# Altium PCB Main.PcbDoc
Units mil, origin at the board's own origin, x right, y up, seen from the top; angles counter-clockwise.
Board outline 670 x 1460 mil, 2 copper layers (Top Layer, Bottom Layer); 20 components, 20 nets, 81 pads, 10 vias.
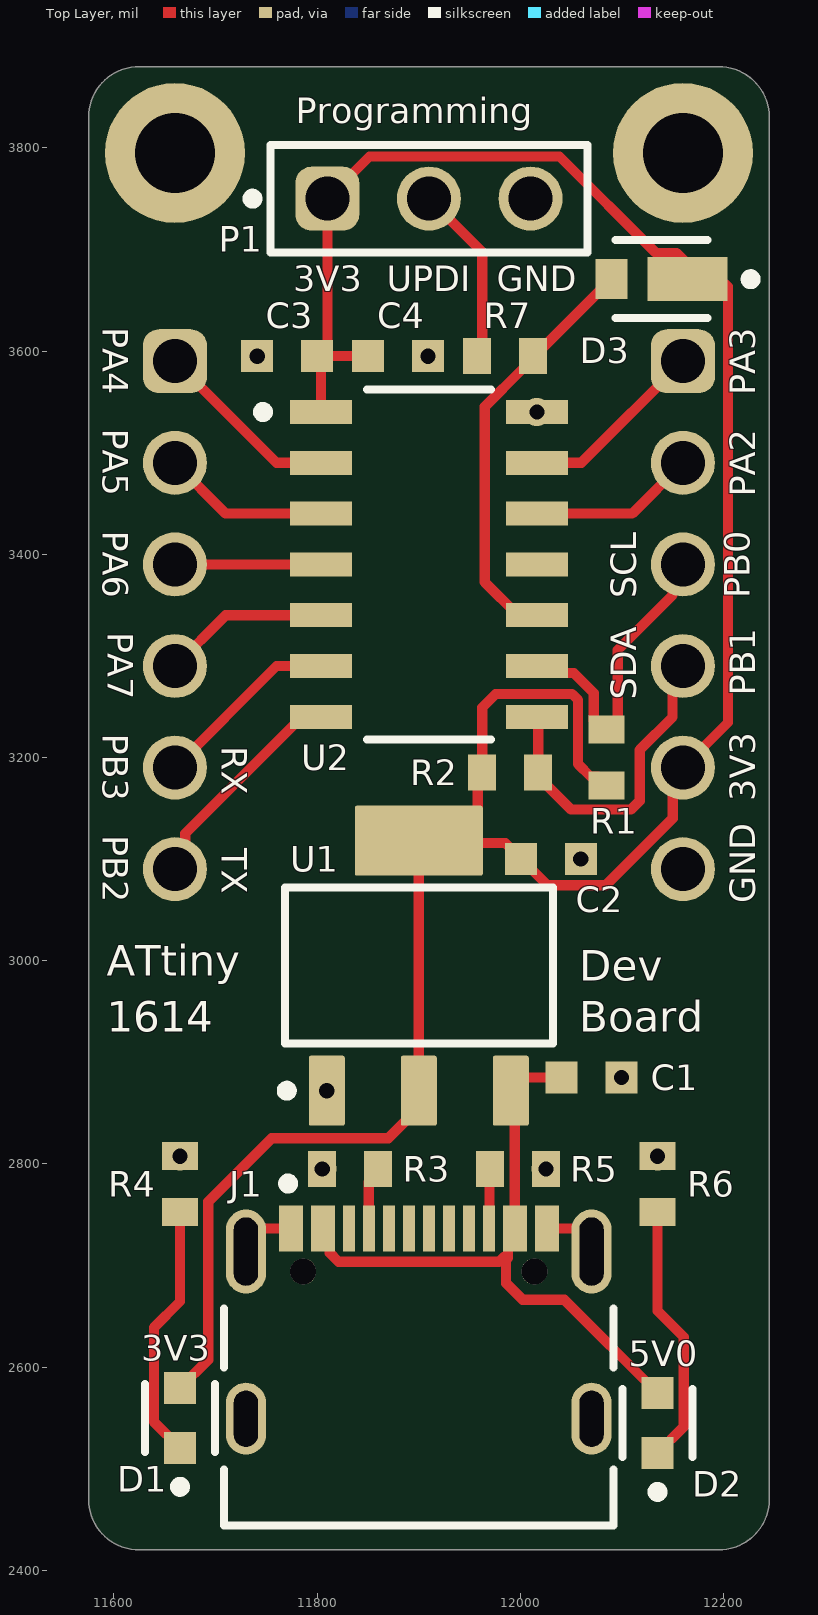
[diagram p0: Top Layer view]
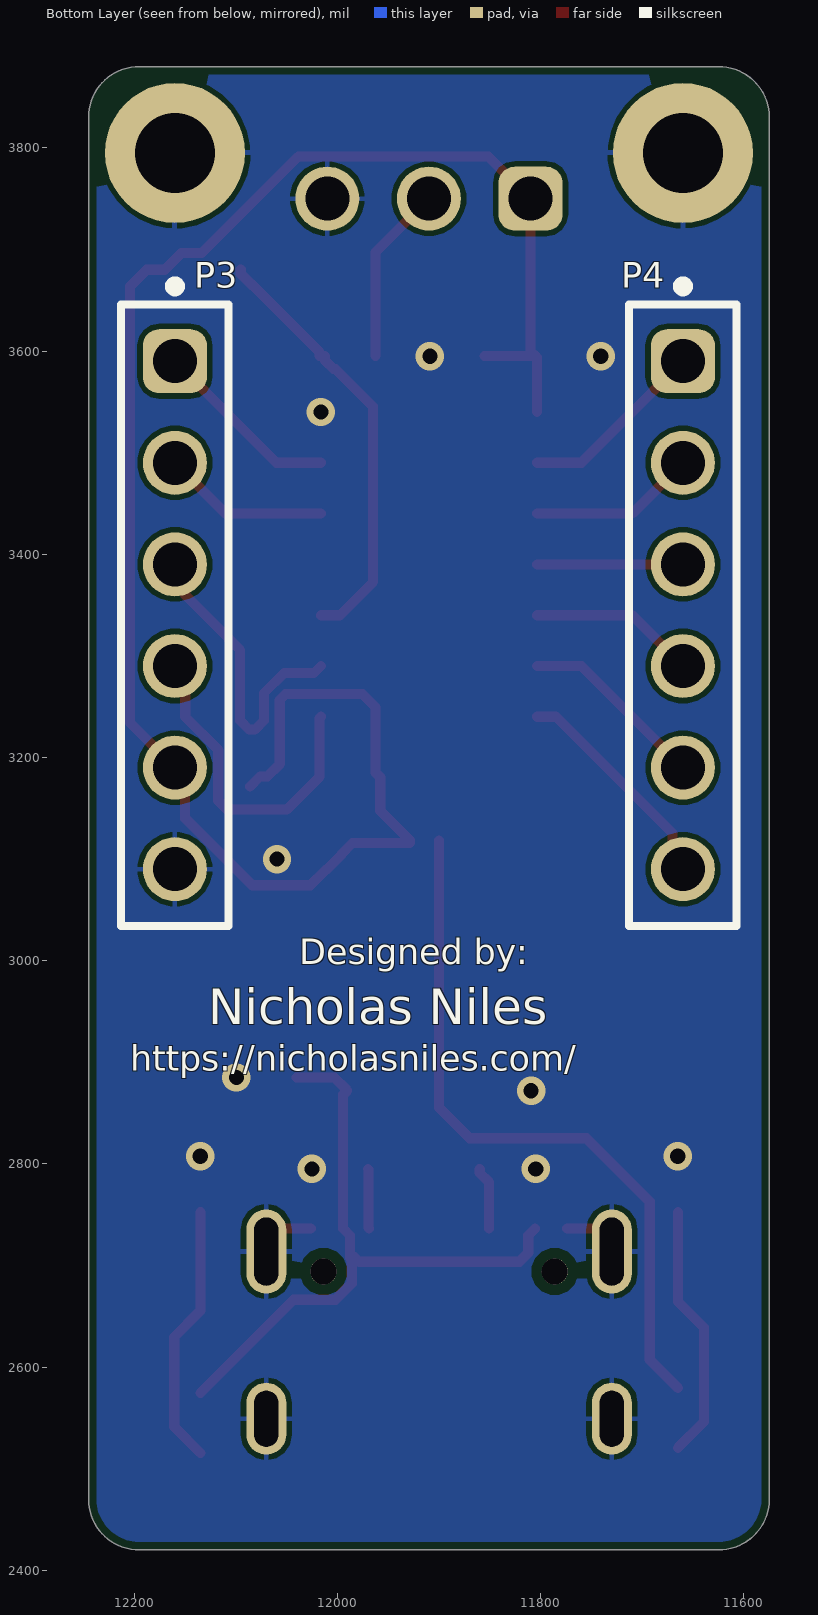
[diagram p1: Bottom Layer view, seen from below]
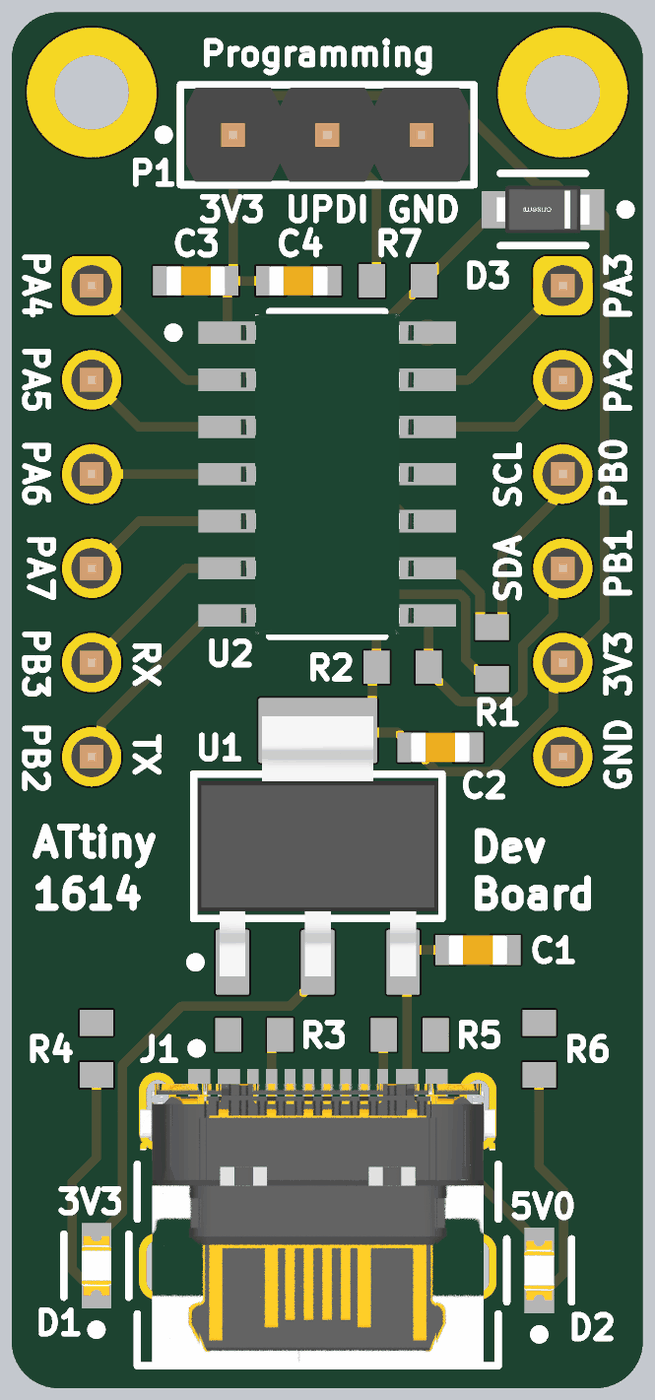
[diagram p2: 3D render of the assembled board from above, using the file's embedded part models]

## Layer stack, top to bottom
Top Solder: solder mask 0.4, Solder Resist, Dk 3.5
Top Layer: signal copper 1.4
Dielectric 1: dielectric 12.6, FR-4, Dk 4.8
Bottom Layer: signal copper 1.4
Bottom Solder: solder mask 0.4, Solder Resist, Dk 3.5

## Board outline
11575,2470 11575,3830 cw(c11625,3830) 11625,3880 12195,3880 cw(c12195,3830) 12245,3830 12245,2470 cw(c12195,2470) 12195,2420 11625,2420 cw(c11625,2470)

## Design rules (kind name [scope] priority, off if disabled: settings)
BoardOutlineClearance [All] p1: gap=7.87 ignorepadtopadclearanceinfootprint=FALSE
Clearance [All] p1: gap=5 ignorepadtopadclearanceinfootprint=TRUE except(10: Arc-Hole Track-Hole SMDPad-Hole THPad-Hole Via-Hole Fill-Hole Poly-Hole Region-Hole Text-Hole)
ComponentClearance [All] p1: gap=5 collisioncheckmode=3 verticalgap=5 showdistances=TRUE
DiffPairsRouting [All] p1: maxlimit=10 minlimit=5 mostfreqgap=5 toplayer_minwidth=5 toplayer_maxwidth=1000 toplayer_prefwidth=5 bottomlayer_minwidth=5 bottomlayer_maxwidth=1000 bottomlayer_prefwidth=5 maxuncoupledlength=500
Height [All] p1: minheight=0 maxheight=71497.94 prefheight=500
HoleSize [All] p1: absolutevalues=TRUE maxlimit=248.03 minlimit=11.81 maxpercent=80.000 minpercent=20.000
HoleToHoleClearance [All] p1: gap=10 allowstackedmicrovias=FALSE
MinimumAnnularRing [All] p1: minimumring=6
MinimumSolderMaskSliver [All] p1: minsoldermaskwidth=6
PlaneClearance [All] p1: clearance=5
PlaneConnect PlaneConnectPowerPads [InPadClass('PowerPads')] p1: planeconnectstyle=Direct reliefexpansion=20 reliefentries=4 reliefconductorwidth=10 reliefairgap=10
PlaneConnect [All] p2: pad.planeconnectstyle=Relief pad.reliefexpansion=11.81 pad.reliefentries=4 pad.reliefconductorwidth=5 pad.reliefairgap=5 via.planeconnectstyle=Direct via.reliefexpansion=11.81 via.reliefentries=4 via.reliefconductorwidth=5 via.reliefairgap=5
PolygonConnect PolygonConnectPowerPads [All vs (InPadClass('PowerPads'))] p1: connectstyle=Direct reliefconductorwidth=10 reliefentries=4 polygonreliefangle="90 Angle" airgapwidth=10
PolygonConnect [All] p2: thpad.connectstyle=Relief thpad.reliefconductorwidth=5 thpad.reliefentries=4 thpad.polygonreliefangle="90 Angle" thpad.airgapwidth=5 smdpad.connectstyle=Relief smdpad.reliefconductorwidth=5 smdpad.reliefentries=4 smdpad.polygonreliefangle="90 Angle" smdpad.airgapwidth=5 via.connectstyle=Direct via.reliefconductorwidth=5 via.reliefentries=4 via.polygonreliefangle="90 Angle" via.airgapwidth=5
RoutingVias [All] p1: holewidth=11.81 width=23.62 viastyle="Through Hole" minholewidth=11.81 minwidth=23.62 maxholewidth=23.62 maxwidth=259.84
SilkToSilkClearance [All] p1: silktosilkclearance=5
SilkToSolderMaskClearance [IsPad] p1: minsilkscreentomaskgap=5 clearancetoexposedcopper=TRUE
SolderMaskExpansion [All] p1: expansion=2 istentingtop=FALSE
SupplyNets "Schematic Supply Nets_3" [InNet('3V3')] p1: voltage=0.000
SupplyNets "Schematic Supply Nets_2" [InNet('5V0')] p2: voltage=0.000
SupplyNets "Schematic Supply Nets_1" [InNet('GND')] p3: voltage=0.000
UnRoutedNet [All] p1: checkbadconnections=TRUE
Width Width_10mil [All] p1: maxlimit=1000 minlimit=10 preferedwidth=10 minimp=50.000000 maximp=50.000000 favimp=50.000000
Width Width_6mil [All] p2: maxlimit=1000 minlimit=6 preferedwidth=6 minimp=50.000000 maximp=50.000000 favimp=50.000000
Width Power_20mil [All] p3: maxlimit=1000 minlimit=20 preferedwidth=20 minimp=50.000000 maximp=50.000000 favimp=50.000000
Width Power_12mil [All] p4: maxlimit=1000 minlimit=12 preferedwidth=12 minimp=50.000000 maximp=50.000000 favimp=50.000000
Width Width_5mil [All] p5: maxlimit=1000 minlimit=5 preferedwidth=5 minimp=50.000000 maximp=50.000000 favimp=50.000000
19 further rules are at their usual default settings.

## Components (designator, comment, footprint, x,y, rotation, side; value= is the part's Value field where it differs from the comment)
C1 "1uF" WCAP-CSGP_0603_L1.6W0.8H0.8_Reflow 12070,2885 r180 top
C2 "1uF" WCAP-CSGP_0603_L1.6W0.8H0.8_Reflow 12030,3100 r180 top
C3 "10uF" WCAP-CSGP_0603_L1.6W0.8H0.8_Reflow 11770.47,3595 r0 top
C4 "1uF" WCAP-CSGP_0603_L1.6W0.8H0.8_Reflow 11879.53,3595 r180 top
D1 "LTST-C190KGKT" FP-LTST-C190KGKT-MFG 11665,2550 r90 top
D2 "LTST-C190KGKT" FP-LTST-C190KGKT-MFG 12135,2545 r90 top
D3 "NRVBSS14HE" FP-477AD-MFG 12139.04,3670.69 r180 top
J1 "USB4105-GF-A" FP-USB4105-GF-A-MFG 11900,2595 r0 top locked
P1 "61300311121" 61300311121 11910,3750 r0 top
P3 "61300611121" 61300611121 12160,3340 r270 bottom
P4 "61300611121" 61300611121 11660,3340 r270 bottom
R1 "1k" RESC1608X55X25NL10T15 12085,3200 r90 top
R2 "1k" RESC1608X55X25NL10T15 11990,3185 r0 top
R3 "5.1k" RESC1608X55X25NL10T15 11832.44,2795 r180 top
R4 "1k" RESC1608X55X25NL10T15 11665,2780 r90 top
R5 "5.1k" RESC1608X55X25NL10T15 11997.56,2795 r0 top
R6 "2.2k" RESC1608X55X25NL10T15 12135,2780 r90 top
R7 "1k" RESC1608X55X25NL10T15 11985,3595 r180 top
U1 "TLV1117LV33DCYR" DCY0004A_N 11900,2995 r90 top locked
U2 "ATTINY1614-SSFR" FP-C04-065-D3X-MFG 11910,3390 r0 top

## Footprints (in the part's own frame and the unit in brackets; to place one, negate y for a bottom-side part, rotate by r counter-clockwise, add the part's x,y. Pads: shape width x height; smd on the part's side, far side on the other; paste and mask are expansions set on the pad)
61300311121 [mm] "Pin Header, pitch 2.54 mm, THT, Vertical, single row, 3p"
  rrect50% 1.6x1.6 hole 1.1: 1(-2.54,0)
  round 1.6 hole 1.1: 2(0,0) 3(2.54,0)
  silkscreen extent -4.53,-1.35 3.96,1.35, body extent -3.81,-1.27 3.81,1.27, height 8.57
61300611121 [mm] "Pin Header, pitch 2.54 mm, THT, Vertical, single row, 6p"
  rrect50% 1.6x1.6 hole 1.1: 1(-6.35,0)
  round 1.6 hole 1.1: 2(-3.81,0) 3(-1.27,0) 4(1.27,0) 5(3.81,0) 6(6.35,0)
  silkscreen extent -8.34,-1.35 7.77,1.35, body extent -7.62,-1.27 7.62,1.27, height 8.57
DCY0004A_N [mm] "SOT223, 4-Leads, Body 6.7x3.7mm, Pitch 2.3mm, IPC Medium Density"
  rrect11% 1.75x0.9 smd: 1(-3.125,2.3) 2(-3.125,0) 3(-3.125,-2.3)
  rrect6% 1.75x3.2 smd: 4(3.125,0)
  silkscreen extent -3.25,-3.35 1.95,3.42, body extent -3.5,-3.25 3.5,3.25, height 1.62
FP-477AD-MFG [mm]
  rect 2x1.1 smd paste+0 mask+0: 1(-0.65,0)
  rect 0.8x1 smd paste+0 mask+0: 2(1.25,0)
  silkscreen extent -2.35,-0.97 1.15,0.97, body extent -1.75,-0.8 1.75,0.8, height 0.25
FP-C04-065-D3X-MFG [mm]
  rect 1.55x0.6 smd paste+0 mask+0: 1(-2.7,3.81) 2(-2.7,2.54) 3(-2.7,1.27) 4(-2.7,0) 5(-2.7,-1.27) 6(-2.7,-2.54) 7(-2.7,-3.81) 8(2.7,-3.81) 9(2.7,-2.54) 10(2.7,-1.27) 11(2.7,0) 12(2.7,1.27) 13(2.7,2.54) 14(2.7,3.81)
  silkscreen extent -4.27,-4.38 1.55,4.38, body extent -3.57,-4.62 3.57,4.62, height 0.25
FP-LTST-C190KGKT-MFG [mm]
  rect 0.8x0.8 smd paste+0 mask+0: 1(-0.75,0) 2(0.75,0)
  silkscreen extent -1.85,-0.87 0.85,0.87, body extent -1.25,-0.55 1.25,0.55, height 0.25
FP-USB4105-GF-A-MFG [mm]
  rrect100% 1x2.1 hole 1.7 slot 0.6 at 0 deg paste-2539.97 mask+0: 1(-4.32,3.015) 2(4.32,3.015)
  rrect100% 1x1.8 hole 1.4 slot 0.6 at 0 deg paste-2539.97 mask+0: 3(-4.32,-1.165) 4(4.32,-1.165)
  rect 0.6x1.15 smd paste+0 mask+0: A1-B12(-3.2,3.59) A4-B9(-2.4,3.59) B1-A12(3.2,3.59) B4-A9(2.4,3.59)
  rect 0.3x1.15 smd paste+0 mask+0: A5(-1.25,3.59) A6(-0.25,3.59) A7(0.25,3.59) A8(1.25,3.59) B5(1.75,3.59) B6(0.75,3.59) B7(-0.75,3.59) B8(-1.75,3.59)
  round 0.65 hole 0.65 unplated paste-2539.97 mask+0: ""(-2.89,2.515) ""(2.89,2.515)
  silkscreen extent -4.86,-3.84 4.86,4.84, body extent -4.96,-3.94 4.96,4.27, height 0.25
RESC1608X55X25NL10T15 [mm] "Chip Resistor, 2-Leads, Body 1.60x0.80mm, IPC Medium Density"
  rect 0.7x0.9 smd: 1(-0.7,0) 2(0.7,0)
  body extent -0.85,-0.45 0.85,0.45, height 0.55
WCAP-CSGP_0603_L1.6W0.8H0.8_Reflow [mm] "Ceramic Capacitors, body 1.6x0.8mm"
  rect 0.8x0.8 smd: 1(-0.75,0) 2(0.75,0)
  body extent -0.8,-0.4 0.8,0.4, height 0.8

## Part data
C1 C2 C3 C4: library part CMP-207839-000060-3, "10V tolerance"
D1 D2: library part CMP-2000-05197-2, "LED GREEN CLEAR CHIP SMD", Case Code (Imperial)=0603, Case Code (Metric)=1608, Color=Green, Forward Current=30mA, Forward Voltage=2V, Lens Color=Colorless, Max Operating Temperature=85°C, Min Operating Temperature=-55°C, Package Quantity=1, Power Dissipation=75mW, Reverse Voltage=5V, Test Current=20mA, Case/Package=0603, Depth=0.8mm, Dominant Wavelength=571nm, Height=0.8mm, Illumination Color=Green, Lead Free="Lead Free", Length=1.6mm, Lens Style=Diffused, Lens Transparency=Clear, Luminous Intensity=35mcd, Mount="Surface Mount", Number of Elements=1, Number of LEDs=1, Number of Pins=2, Packaging="Tape and Reel", Power Rating=75mW, Radiation Hardening=No, Viewing Angle=130°, Wavelength=574nm, Width=0.8mm
D3: library part CMP-00278-93203856-2, "NRVBSS14HE Rectifier Diode, Schottky, 1 Phase, 1 Element, 1A, 40V V(RRM), Silicon", Capacitance=55pF, Forward Current=1A, Manufacturer Lifecycle Status=ACTIVE, Max Forward Surge Current (Ifsm)=25A, Max Junction Temperature (Tj)=150°C, Max Repetitive Reverse Voltage (Vrrm)=40V, Min Operating Temperature=-55°C, Peak Reverse Current=5µA, Height=750µm, Lifecycle Status=Production, Max Operating Temperature=150°C, NexarPartId=93203856, Reverse Voltage=40V, RoHS=Compliant
J1: library part CMP-245163-000001-1, "CONN RCPT USB2.0 TYPEC 5A", Current Rating=5/6.25/1.25/0.25A, Manufacturer=GCT, Package=0, Temperature="-40°C to +85°C", Temperature Range High=+85°C, Temperature Range Low=-40°C, Voltage Rating=20V, Automotive=No, Category=Conn, ComponentLink2Description=Datasheet, ComponentLink2URL=https://gct.co/files/drawings/usb4105.pdf, Conn Orientation="Right Angle", Contact Material=Gold,Nickel, Device Class L1=Connectors, Device Class L2="USB Connectors", Device Class L3=unset, Digikey Description="CONN RCPT USB2.0 TYPEC 5A", Height=3.46mm, Is Female=yes, Lead Free=Yes, Manufacturer Part Number=USB4105-GF-A, Number of Contacts=16, Octopart=https://octopart.com/usb4105-gf-a-gct-106627878, RoHS=TRUE, Usb Standard="USB 2.0"
P1: library part CMP-1502-01062-4, "THT Vertical Pin Header WR-PHD, Pitch 2.54 mm, Single Row, 3 pins", Color=Black, Contact Resistance=20mΩ, Current Rating=3A, Max Operating Temperature=105°C, Min Operating Temperature=-40°C, Operating Supply Voltage=250V, Connector Type="Male Pin", Contact Material=Gold, Contact Mating Length=5.9944mm, Contact Plating=Gold, Gender=Male, Height=8.94mm, Lead Free="Lead Free", Lead Pitch=2.54mm, Mount="Through Hole", Number of Contacts=3, Number of Pins=3, Number of Positions=3, Number of Rows=1, Orientation=Vertical, Packaging=Bulk, Pitch=2.54mm, RoHS=Compliant, Termination=Solder, Voltage Rating=250V
P3 P4: library part CMP-1502-01070-3, Color=Black, Contact Resistance=20mΩ, Current Rating=3A, Max Operating Temperature=105°C, Min Operating Temperature=-40°C, Operating Supply Voltage=250V, Connector Type="Male Pin", Contact Gender=Male, Contact Material=Copper, Contact Mating Length=5.9944mm, Contact Plating=Gold, Gender=Male, Height=8.89mm, Housing Material=PBT, Lead Free="Lead Free", Lead Pitch=2.54mm, Mount="Through Hole", NexarPartId=20084590, Number of Contacts=6, Number of Pins=6, Number of Positions=6, Number of Rows=1, Orientation=Vertical, Packaging=Bulk, Pitch=2.54mm, REACH SVHC=Unknown, RoHS=Compliant, Termination="Through Hole", Voltage Rating=250V
R1 R2 R3 R4 R5 R6 R7: library part CMP-2000-04186-1
U1: library part CMP-0395-00503-2, "Single Output LDO, 1 A, Fixed 3.3 V Output, 2 to 5.5 V Input, 4-pin SOT-223 (DCY), -40 to 125 degC, Green (RoHS & no Sb/Br)", Manufacturer="Texas Instruments", Accuracy(%)=2, Code_JEDEC=TO-261, ComponentLink1Description="Manufacturer URL", ComponentLink1URL=http://www.ti.com/, ComponentLink2Description=Datasheet, ComponentLink2URL=http://www.ti.com/general/docs/lit/getliterature.tsp?genericPartNumber=TLV1117LV33&fileType=pdf, ComponentLink3Description="Package Specification", ComponentLink3URL=http://www.ti.com/litv/pdf/mpds094a, DatasheetVersion=SBVS160A, Eco-Plan="Green (RoHS & no Sb/Br)", Fixed Output Options(V)=3.3, Iout(Max)(A)=1, Iq(Typ)(mA)=0.05, Mounting Technology="Surface Mount", PackageDescription="4-Pin Plastic Small Outline, Body 3.5 x 6.5 mm, Pitch 2.3 mm", PackageReference=DCY0004A, PackageVersion=4202506/B, PartNumber=TLV1117LV33DCYR, SubFamily="Single Channel LDO", Vdo(Typ)(mV)=1200, Vin(Max)(V)=5.5, Vin(Min)(V)=2, Vout Adj(Max)(V)=3.3, Vout Adj(Min)(V)=3.3
U2: library part CMP-06276-000021-1, "IC MCU 8BIT 16KB FLASH 14SOIC", Frequency=16MHz, Manufacturer=Microchip, Max Supply Voltage=5.5V, Min Supply Voltage=1.8V, Nominal Supply Current=2.6-10200uA, Package=C04-065-D3X, Temperature="-40°C to +125°C", Temperature Range High=+125°C, Temperature Range Low=-40°C, Automotive=No, Category=IC, ComponentLink2Description=Datasheet, ComponentLink2URL=http://ww1.microchip.com/downloads/en/DeviceDoc/ATtiny1614-DataSheet-DS40001995B.pdf, Core Architecture=AVR, Data Bus Width=8bits, Device Class L1="Integrated Circuits (ICs)", Device Class L2="Embedded Processors and Controllers", Device Class L3=Microcontrollers, Digikey Description="IC MCU 8BIT 16KB FLASH 14SOIC", Height=1.75mm, Interface=I2C,SPI,UART,USART,2-Wire,LIN,IrDA, Ipc Land Pattern Name=SOIC127P600X175-14, Lead Free=Yes, Manufacturer Part Number=ATTINY1614-SSFR, Memory Size=16KBytes, Memory Type=FLASH, Mouser Description="8-Bit AVR Microcontroller 16Kbyte Flash 2Kbyte SRAM 14-Pin SOIC T/R", Number Of A/D Converters=2, Number Of Adc Channels=14, Number Of Cores=1, Number Of I2C Channels=1, Number Of I/Os=12, Number Of Pwm Channels=1, Number Of Spi Channels=1, Number Of Timers/Counters=5, Number Of Uart Channels=1, Octopart=https://octopart.com/attiny1614-ssfr-microchip-82181131, Ram Size=2KBytes, RoHS=TRUE, Standoff Height=0.1mm

## Free pads (board coordinates)
  round 137.79 hole 78.74: 7(11660,3795) 7(12160,3795)

## Via types
v1: diameter 28, hole 15, Top Layer to Bottom Layer, tented both sides, 10 vias

## Nets (pads, with @x,y where several pads share a name; then routed paths per layer and width w, separated by ;. In a path a pad name is that pad's centre, name@x,y a point inside that pad or via, vN(x,y) a via of type N, cw(c..) or ccw(c..) an arc to the next point about the centre after c; other vN are vias at no path point)
3V3: C2.2 C3.2 C4.2 D1.2 D3.1 P1.1 P3.5 R1.1 R2.1 U1.2 U1.4 U2.1 | length 2591
  Top Layer w10: D1.2 11692.72,2607.24 11692.72,2762.72 11755.18,2825.18 11869.94,2825.18 11900,2855.24 U1.2 U1.4 ; U2.1 11803.7,3593.7 C3.2@11805,3595 ; C4.2@11855,3595 11810,3595 C3.2@11805,3595 ; U1.4@11928.54,3115.75 11985.2,3115.75 11995.94,3105 11995.94,3104.53 12011.22,3089.25 12011.69,3089.25 12026.69,3074.25 12083.98,3074.25 12149.94,3140.21 12149.94,3179.94 P3.5 12204.37,3234.37 12204.37,3663.35 12187.72,3680 12170,3680 12153.35,3696.65 12133.35,3696.65 12038.5,3791.5 11851.5,3791.5 P1.1 11810,3600 C3.2@11805,3595 ; U1.4@11928.54,3118.03 11957.99,3147.48 11957.99,3180.55 R2.1 11962.44,3249.2 11975.64,3262.39 12050.95,3262.39 12056.81,3256.53 12056.81,3193.45 12069.04,3181.22 12076.22,3181.22 R1.1@12085.96,3171.48
5V0: C1.2 D2.2 J1.A4-B9 J1.B4-A9 U1.3 | length 647.1
  Top Layer w10: J1.A4-B9 11812.32,2729.53 11812.32,2712.43 11821.06,2703.7 11978.95,2703.7 11983.38,2708.13 ; C1.2 12003.27,2885 11990.55,2872.28 U1.3 11994.49,2868.03 J1.B4-A9 11987.68,2729.53 11987.68,2707.22 11985.98,2705.53 11985.98,2682.5 12002.27,2666.22 12043.31,2666.22 D2.2
GND: C1.1 C2.1 C3.1 C4.1 J1.1 J1.2 J1.3 J1.4 J1.A1-B12 J1.B1-A12 P1.3 P3.6 pad.7 R3.2 R4.2 R5.2 R6.2 U1.1 U2.14 | length 117.6
  Top Layer w10: J1.1 11729.92,2722.77 11743.49,2736.34 J1.A1-B12 ; J1.B1-A12 12056.51,2736.34 12070.08,2722.77 J1.2
  other v1: 11804.88,2795 12025.12,2795 11665,2807.56 12135,2807.56 11809.45,2871.97 12099.53,2885 12059.53,3100 12016.3,3540 11740.94,3595 11909.06,3595
NetD1_1: D1.1 R4.1 | length 253.3
  Top Layer w10: D1.1 11639.25,2546.22 11639.25,2638.78 11665,2664.52 R4.1
NetD2_1: D2.1 R6.1 | length 258.3
  Top Layer w10: D2.1 12160.75,2541.22 12160.75,2629.57 12135,2655.31 R6.1
NetJ1_A5: J1.A5 R3.1 | length 62.5
  Top Layer w10: J1.A5 11850.79,2781.85 11860,2791.06 R3.1
NetJ1_B5: J1.B5 R5.1 | length 59.1
  Top Layer w10: J1.B5 11969.45,2736.89 11969.45,2794.45 R5.1
NetP1_2: P1.2 R7.2 | length 176.7
  Top Layer w10: P1.2 11962.44,3697.56 R7.2@11962.44,3595
PA1: U2.11
PA2: P3.2 U2.12 | length 164.4
  Top Layer w10: U2.12 12110,3440 P3.2
PA3: P3.1 U2.13 | length 185.1
  Top Layer w10: U2.13 12060,3490 P3.1
PA4: P4.1 U2.2 | length 185.1
  Top Layer w10: P4.1 11760,3490 U2.2
PA5: P4.2 U2.3 | length 164.4
  Top Layer w10: P4.2 11710,3440 U2.3
PA6: P4.3 U2.4 | length 143.7
  Top Layer w10: P4.3 U2.4
PA7: P4.4 U2.5 | length 164.4
  Top Layer w10: P4.4 11710,3340 U2.5
PB0//SCL: P3.3 R1.2 U2.9 | length 303.9
  Top Layer w10: U2.9 12023.11,3283.19 12052.52,3283.19 12072.28,3263.43 12072.28,3236.34 12081.06,3227.56 R1.2 ; R1.2@12086.22,3227.56 12087.03,3227.56 12095.81,3236.34 12095.81,3305.81 12149.86,3359.86 12149.86,3379.86 P3.3
PB1//SDA: P3.4 R2.2 U2.8 | length 326.6
  Top Layer w10: U2.8 12017.56,3238.74 12017.56,3181.06 12049.96,3148.66 12108.71,3148.66 12117.43,3157.38 12117.43,3207.43 12149.86,3239.86 12149.86,3279.86 P3.4
PB2//TX: P4.6 U2.7 | length 220.5
  Top Layer w10: P4.6 11670.14,3100.14 11670.14,3125.14 11785,3240 U2.7
PB3//RX: P4.5 U2.6 | length 185.1
  Top Layer w10: P4.5 11760,3290 U2.6
UPDI: D3.2 R7.1 U2.10 | length 425.3
  Top Layer w10: R7.1 12012.56,3591.06 12003.78,3582.28 12002.12,3582.28 11965,3545.17 11965,3372.6 11997.6,3340 U2.10 ; R7.1@12017.56,3595 12017.56,3598.94 12083.94,3665.31 12084.45,3665.31 12095.2,3676.06 D3.2@12095.2,3680
pads on no net: J1. J1.A6 J1.A7 J1.A8 J1.B6 J1.B7 J1.B8

## Polygon pours and split planes (outlines as drawn)
GND on Bottom Layer "GND_L02_P000" (solid, pour order 0): 11575,3880 12245,3880 12245,2420 11575,2420

## Silkscreen, mask and mechanical layers (free items; w line width, h text height)
Top Overlay:
  text "Programming" at 11778.79,3824.33 h25
  text "3V3" at 11776.68,3659.01 h25
  text "UPDI" at 11868.35,3659.01 h25
  text "GND" at 11976.68,3659.01 h25
  text "PA4" at 11589.01,3623.32 h25 r270
  text "PA3" at 12230.99,3556.68 h25 r90
  text "PA5" at 11589.01,3523.32 h25 r270
  text "PA2" at 12230.99,3456.68 h25 r90
  text "PA6" at 11589.01,3423.32 h25 r270
  text "SCL" at 12114,3356.68 h25 r90
  text "PB0" at 12225.99,3356.68 h25 r90
  text "PA7" at 11594.01,3323.32 h25 r270
  text "PB1" at 12230.99,3260.84 h25 r90
  text "SDA" at 12114,3256.68 h25 r90
  text "PB3" at 11589.01,3223.32 h25 r270
  text "RX" at 11706,3210.83 h25 r270
  text "3V3" at 12230.99,3156.68 h25 r90
  text "PB2" at 11589.01,3123.32 h25 r270
  text "TX" at 11706,3110.83 h25 r270
  text "GND" at 12230.99,3056.68 h25 r90
  text "ATtiny" at 11593,2985 h30
  text "Dev" at 12058,2980 h30
  text "1614" at 11593,2930 h30
  text "Board" at 12058,2930 h30
  text "3V3" at 11626.68,2606 h25
  text "5V0" at 12106.68,2601 h25
Bottom Overlay:
  text "Designed by:" at 12037.46,2996.67 h25
  text "Nicholas Niles" at 12127.43,2937.51 h35
  text "https://nicholasniles.com/" at 12204.07,2891.67 h25
Mechanical 1:
  the board outline again, w10